# Altium PCB RPi_Repeater_Board_Altium.pcbdoc
Units mil, origin at the board's own origin, x right, y up, seen from the top; angles counter-clockwise.
Board outline 3300 x 2205 mil, 2 copper layers (Top Layer, Bottom Layer); 24 components, 19 nets, 59 pads, 3 vias.
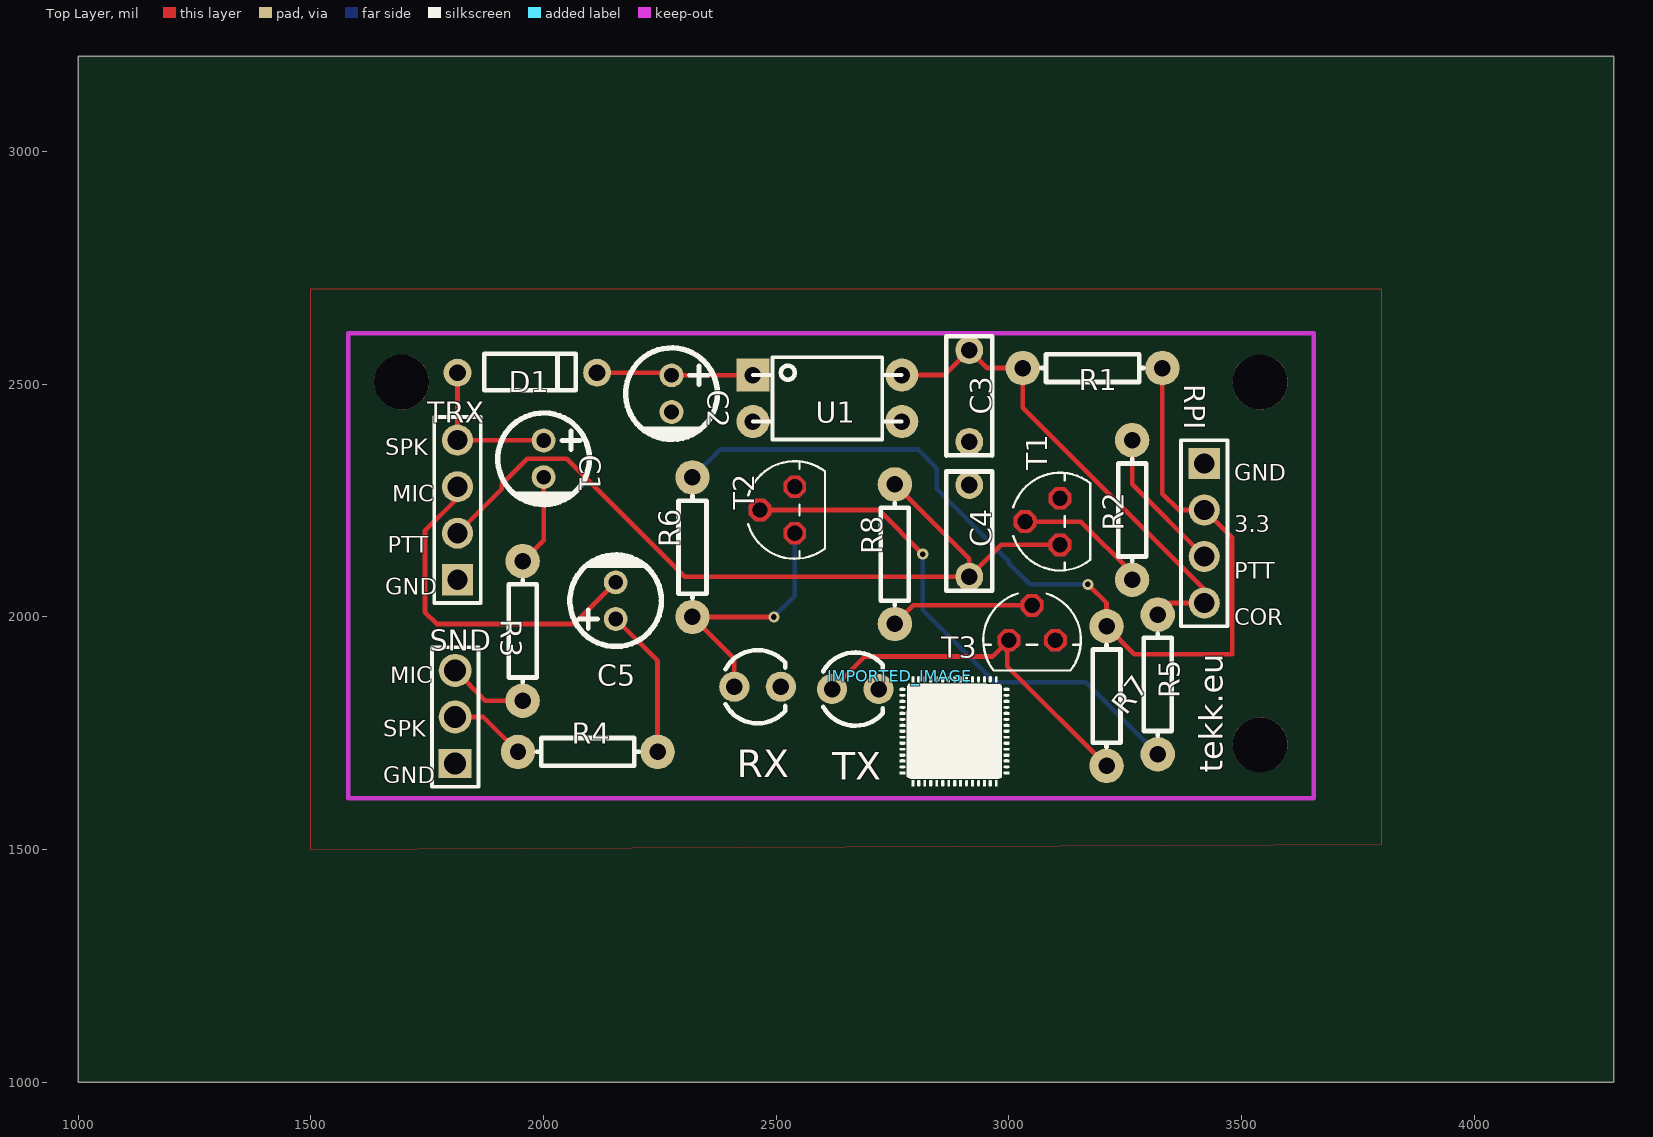
[diagram p0: Top Layer view]
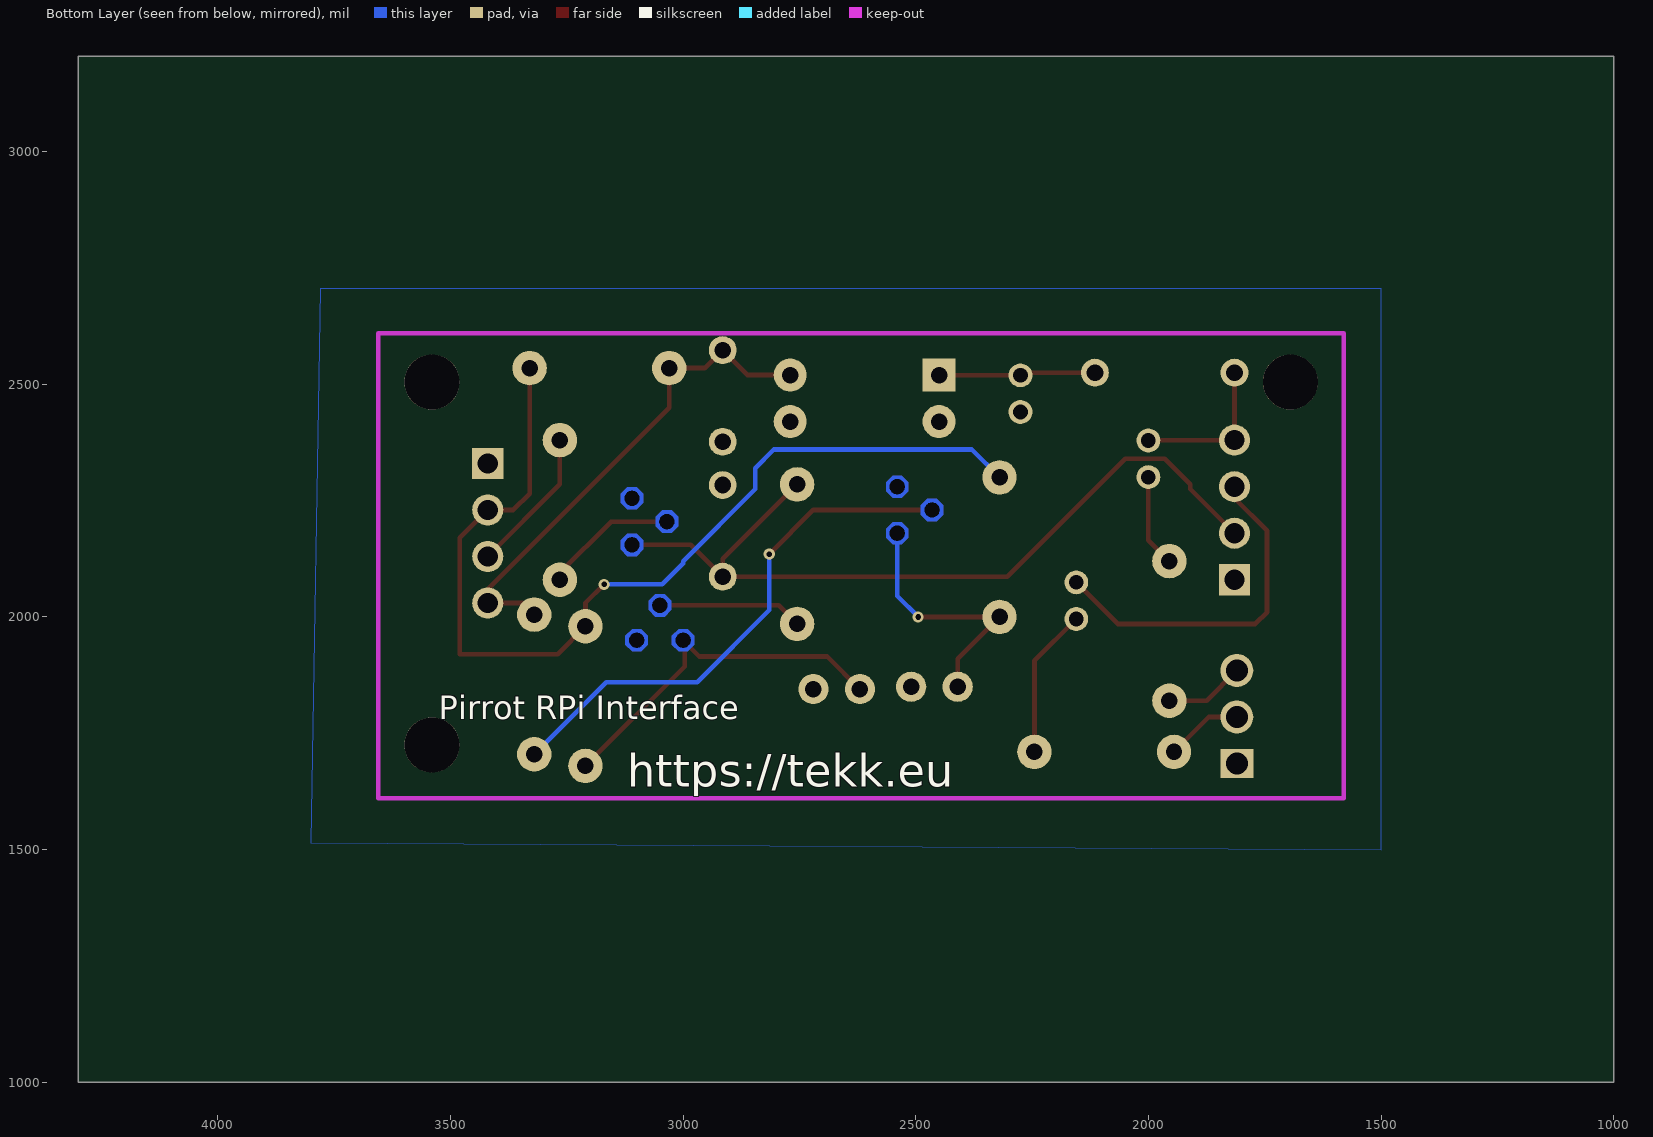
[diagram p1: Bottom Layer view, seen from below]

## Layer stack, top to bottom
Top Layer: signal copper (thickness not stored)
Dielectric: dielectric 12.6, FR-4, Dk 4.8
Bottom Layer: signal copper (thickness not stored)

## Board outline
4300,1000 1000,1000 1000,3205 4300,3205

## Components (designator, comment, footprint, x,y, rotation, side; value= is the part's Value field where it differs from the comment)
C1 "1u" CAP-D5.0XF2.0 2000,2340 r270 top
C2 "10u" CAP-D5.0XF2.0 2275,2480 r270 top
C3 "100nF" CAP-SC_6.5X2.5XP5.0 2915,2475 r90 top
C4 "100nF" CAP-SC_6.5X2.5XP5.0 2915,2185 r270 top
C5 "1u" CAP-D5.0XF2.0 2155,2035 r90 top
D1 "BAT43" "DO-35 THRU-HOLE DIODE" 1715,2625 r0 top
IMPORTED_IMAGE "IMPORTED_IMAGE" IMPORTED_IMAGE 2765.06,1872.07 r0 top
R1 "1k" AXIAL-0.3 3180,2535 r0 top
R2 "1k" AXIAL-0.3 3265,2230 r90 top
R3 "10k" AXIAL-0.3 1955,1970 r270 top
R4 "10k" AXIAL-0.3 2095,1710 r0 top
R5 "1k" AXIAL-0.3 3320,1855 r90 top
R6 "1k" AXIAL-0.3 2320,2150 r90 top
R7 "1k" AXIAL-0.3 3210,1830 r90 top
R8 "1k" AXIAL-0.3 2755,2135 r90 top
RPI "Raspberry" HDR-TH_4P-P2.54-V 3420,2180 r270 top
RX "GREEN" LED-3MM/2.54 2460,1850 r90 top
SND "SoundCard" HDR-TH_3P-P2.54-V 1810,1785 r90 top
T1 "BC547" TO92 3110,2255 r90 top
T2 "BC547" TO92 2540,2280 r90 top
T3 "BC547" TO92 3100,1950 r0 top
TRX "Transceiver" HDR-TH_4P-P2.54-V 1815,2230 r90 top
TX "RED" LED-3MM/2.54 2670,1845 r90 top
U1 "PC817" PC817 2450,2420 r0 top

## Footprints (in the part's own frame and the unit in brackets; to place one, negate y for a bottom-side part, rotate by r counter-clockwise, add the part's x,y. Pads: shape width x height; smd on the part's side, far side on the other; paste and mask are expansions set on the pad)
AXIAL-0.3 [mil]
  round 74 hole 35.4: 1(-150,0) 2(150,0)
  silkscreen extent -110,-30 110,30
CAP-D5.0XF2.0 [mm]
  round 1.3 hole 0.8: 1(-1,0) 2(1,0)
  silkscreen extent -2.5,-2.5 2.5,2.5
CAP-SC_6.5X2.5XP5.0 [mil]
  round 60 hole 36: 1(-98.4,0) 2(98.4,0)
  silkscreen extent -128,-49 128,49
"DO-35 THRU-HOLE DIODE" [mil]
  round 60 hole 36: 1(100,-100) 2(400,-100)
  silkscreen extent 157,-138 354,-59
HDR-TH_3P-P2.54-V [mm]
  rect 1.575x1.8 hole 1.2: 1(-2.54,0)
  round 1.8 hole 1.2: 2(0,0) 3(2.54,0)
  silkscreen extent -3.81,-1.27 3.81,1.27
HDR-TH_4P-P2.54-V [mm]
  rect 1.7x1.7 hole 1.1: 1(-3.81,0)
  round 1.7 hole 1.1: 2(-1.27,0) 3(1.27,0) 4(3.81,0)
  silkscreen extent -5.08,-1.27 5.08,1.27
IMPORTED_IMAGE [mil]
  silkscreen extent 0,-236 236,0
LED-3MM/2.54 [mil]
  round 65 hole 35.43: 1(0,50) 2(0,-50)
  silkscreen extent -79,-59 79,69
PC817 [mm]
  rect 1.8x1.8 hole 0.9: 1(0,2.54)
  round 1.8 hole 0.9: 2(0,0) 3(8.128,0) 4(8.128,2.54)
  silkscreen extent 0,-0.98 8.13,3.52
TO92 [mil]
  round 0 hole 32 slot 32.2 at 0 deg: 1(0,0) 2(-50,75) 3(-100,0)
  Top Layer region: 24.02,9.95 9.95,24.02 -9.95,24.02 -24.02,9.95 -24.02,-9.95 -9.95,-24.02 9.95,-24.02 24.02,-9.95
  Top Layer region: -25.98,84.95 -40.05,99.02 -59.95,99.02 -74.02,84.95 -74.02,65.05 -59.95,50.98 -40.05,50.98 -25.98,65.05
  Top Layer region: -75.98,9.95 -90.05,24.02 -109.95,24.02 -124.02,9.95 -124.02,-9.95 -109.95,-24.02 -90.05,-24.02 -75.98,-9.95
  Bottom Layer region: 24.02,9.95 9.95,24.02 -9.95,24.02 -24.02,9.95 -24.02,-9.95 -9.95,-24.02 9.95,-24.02 24.02,-9.95
  Bottom Layer region: -25.98,84.95 -40.05,99.02 -59.95,99.02 -74.02,84.95 -74.02,65.05 -59.95,50.98 -40.05,50.98 -25.98,65.05
  Bottom Layer region: -75.98,9.95 -90.05,24.02 -109.95,24.02 -124.02,9.95 -124.02,-9.95 -109.95,-24.02 -90.05,-24.02 -75.98,-9.95
  silkscreen extent -155,-65 55,100

## Free pads (board coordinates)
  round 118.11 hole 118.11 unplated: ""(1695,2505) ""(3540,1725) ""(3540,2505)

## Via types
v1: diameter 24, hole 12, Top Layer to Bottom Layer, 3 vias

## Nets (pads, with @x,y where several pads share a name; then routed paths per layer and width w, separated by ;. In a path a pad name is that pad's centre, name@x,y a point inside that pad or via, vN(x,y) a via of type N, cw(c..) or ccw(c..) an arc to the next point about the centre after c; other vN are vias at no path point)
D1_2: C2.1 D1.2 U1.1 | length 337.3
  Top Layer w10: D1.2 2269.37,2525 C2.1 ; C2.1 U1.1
GND: C2.2 C3.1 C4.1 RPI.1 RX.2 SND.1 T1.1 T2.1 T3.1 TRX.1 TX.2 U1.2 U1.3
LED_TX_1: R7.1 T3.3 TX.1 | length 778.4
  Top Layer w10: TX.1 2690,1915 2965,1915 T3.3 ; 2996.45,1946.44 2996.45,1893.56 R7.1
R2_1: R2.1 T1.2 | length 290.6
  Top Layer w10: T1.2 3155,2205 3265,2095 R2.1
R3_1: C1.2 R3.1 | length 199.3
  Top Layer w10: R3.1 2000,2165 C1.2
R4_2: C5.1 R4.2 | length 322.9
  Top Layer w10: C5.1 2245,1905.63 R4.2
R8_1: R8.1 T3.2 | length 311.6
  Top Layer w10: R8.1 2795,2025 T3.2
RPICOR: C3.2 R1.1 R5.2 RPI.4 U1.4 | length 1074.9
  Top Layer w10: U1.4 2861.6,2520 C3.2 2953.4,2535 R1.1 3030,2450 3420,2060 RPI.4 3345,2030 R5.2
RPIPTT: R2.2 RPI.3 | length 314.2
  Top Layer w10: R2.2 3265,2285 RPI.3
S$22: 
S$992: 
SNDCARDMIC: R3.2 SND.3 | length 171.9
  Top Layer w10: SND.3 1875,1820 R3.2
SNDCARDSPK: R4.1 SND.2 | length 166.1
  Top Layer w10: SND.2 1870,1785 R4.1
T2_2: R5.1 T2.2 | length 1142.8
  Top Layer w10: T2.2 2720,2230 v1(2815,2135)
  Bottom Layer w10: v1(2815,2135) 2815,2015 2970,1860 3165,1860 R5.1
T2_3: R6.1 RX.1 T2.3 | length 560.9
  Top Layer w10: RX.1 2410,1910 R6.1 v1(2495,2000)
  Bottom Layer w10: v1(2495,2000) 2540,2045 T2.3
TRXMIC: C5.2 TRX.3 | length 756.4
  Top Layer w10: TRX.3 1815,2255 1745,2185 1745,2010 1770,1985 2065.63,1985 C5.2
TRXPTT: C4.2 R8.2 T1.3 TRX.2 | length 1765.1
  Top Layer w10: TRX.2 1910,2275 1910,2285 1965,2340 2050,2340 2303.4,2086.6 C4.2 ; R8.2 2915,2125 C4.2 ; T1.3 2983.4,2155 C4.2
TRXSPK: C1.1 D1.1 TRX.4 | length 330
  Top Layer w10: D1.1 TRX.4 C1.1
VCC: R1.2 R6.2 R7.2 RPI.2 | length 2135
  Top Layer w10: v1(3170,2070) 3210,2030 R7.2 3270,1920 3480,1920 3480,2170 RPI.2 3365,2230 3330,2265 R1.2
  Bottom Layer w10: R6.2 2380,2360 2805,2360 2845,2320 2845,2275 3000,2120 3000,2115 3045,2070 v1(3170,2070)

## Polygon pours and split planes (outlines as drawn)
GND on Top Layer (solid): 1500,2705 3800,2705 3800,1510 1500,1500
GND on Bottom Layer (solid): 1500,2705 3780,2705 3800,1515 1500,1500

## Silkscreen, mask and mechanical layers (free items; w line width, h text height)
Top Overlay:
  text "SPK" at 1660,2347.5 h35
  text "GND" at 3485,2292.5 h35
  text "MIC" at 1675,2247.5 h35
  text "3.3" at 3485,2182.5 h35
  text "PTT" at 1665,2137.5 h35
  text "PTT" at 3485,2082.5 h35
  text "GND" at 1660,2047.5 h35
  text "COR" at 3485,1982.5 h35
  text "MIC" at 1670,1857.5 h35
  text "SPK" at 1655,1742.5 h35
  text "tekk.eu" at 3460,1665 h50 r90
  text "GND" at 1655,1642.5 h35
Bottom Overlay:
  text "Pirrot RPi Interface" at 3525,1780 h50
  text "https://tekk.eu" at 3120,1635 h70

## Text inside footprints (layer, text, board x,y; h text height)
T1: Document "2" at 3035,2180 h50 r270; Document "3" at 3060,2120 h50 r270; Document "1" at 3060,2250 h50 r270
T2: Document "2" at 2465,2205 h50 r270; Document "3" at 2490,2145 h50 r270; Document "1" at 2460,2280 h50 r270
T3: Document "2" at 3025,2025 h50 r180; Document "3" at 2965,2000 h50 r180; Document "1" at 3095,2000 h50 r180